# Altium PCB LedStatus.PcbDoc
Units mil, origin at the board's own origin, x right, y up, seen from the top; angles counter-clockwise.
Board outline 2650 x 2255 mil, 2 copper layers (Top Layer, Bottom Layer); 40 components, 25 nets, 158 pads, 26 vias.
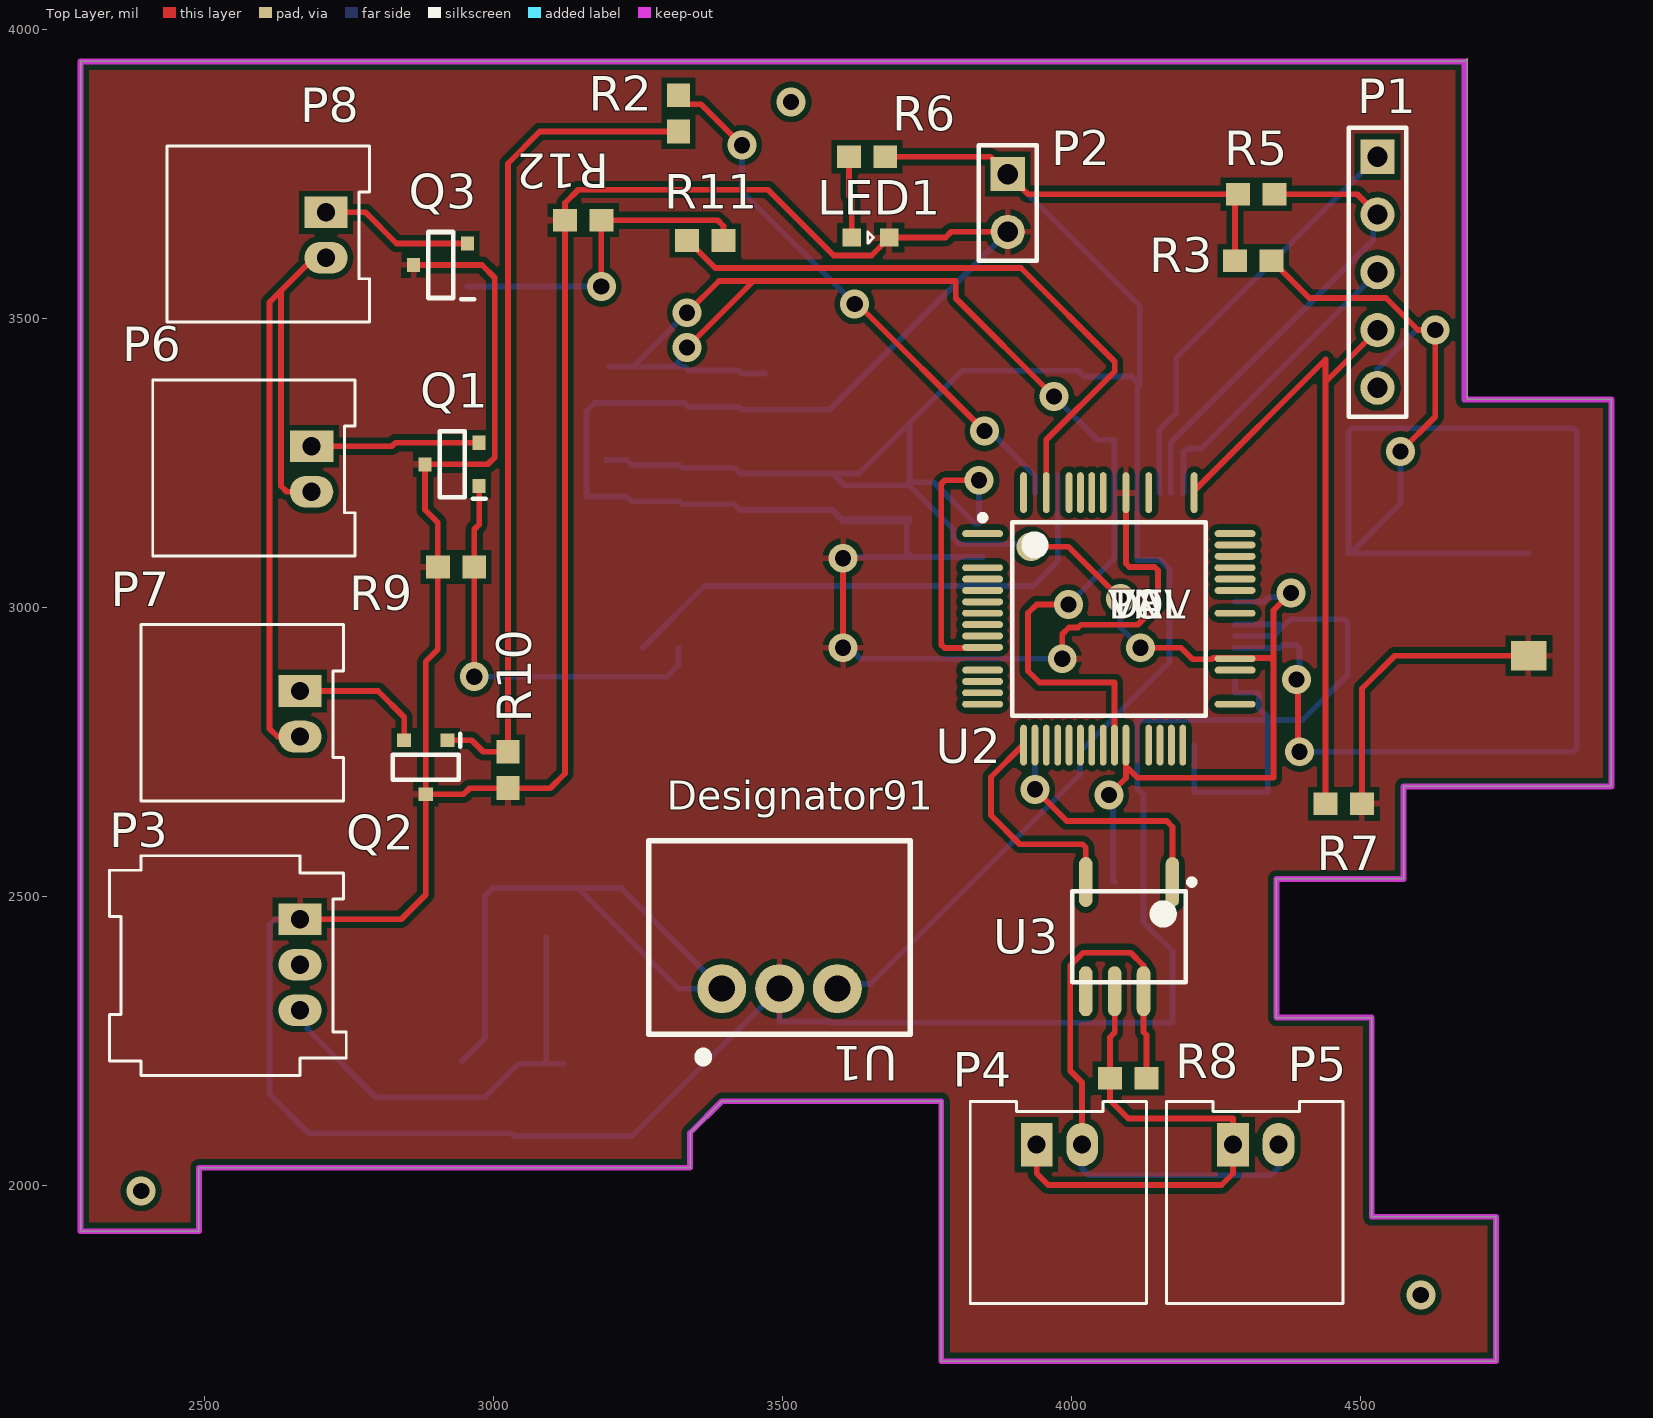
[diagram p0: Top Layer view]
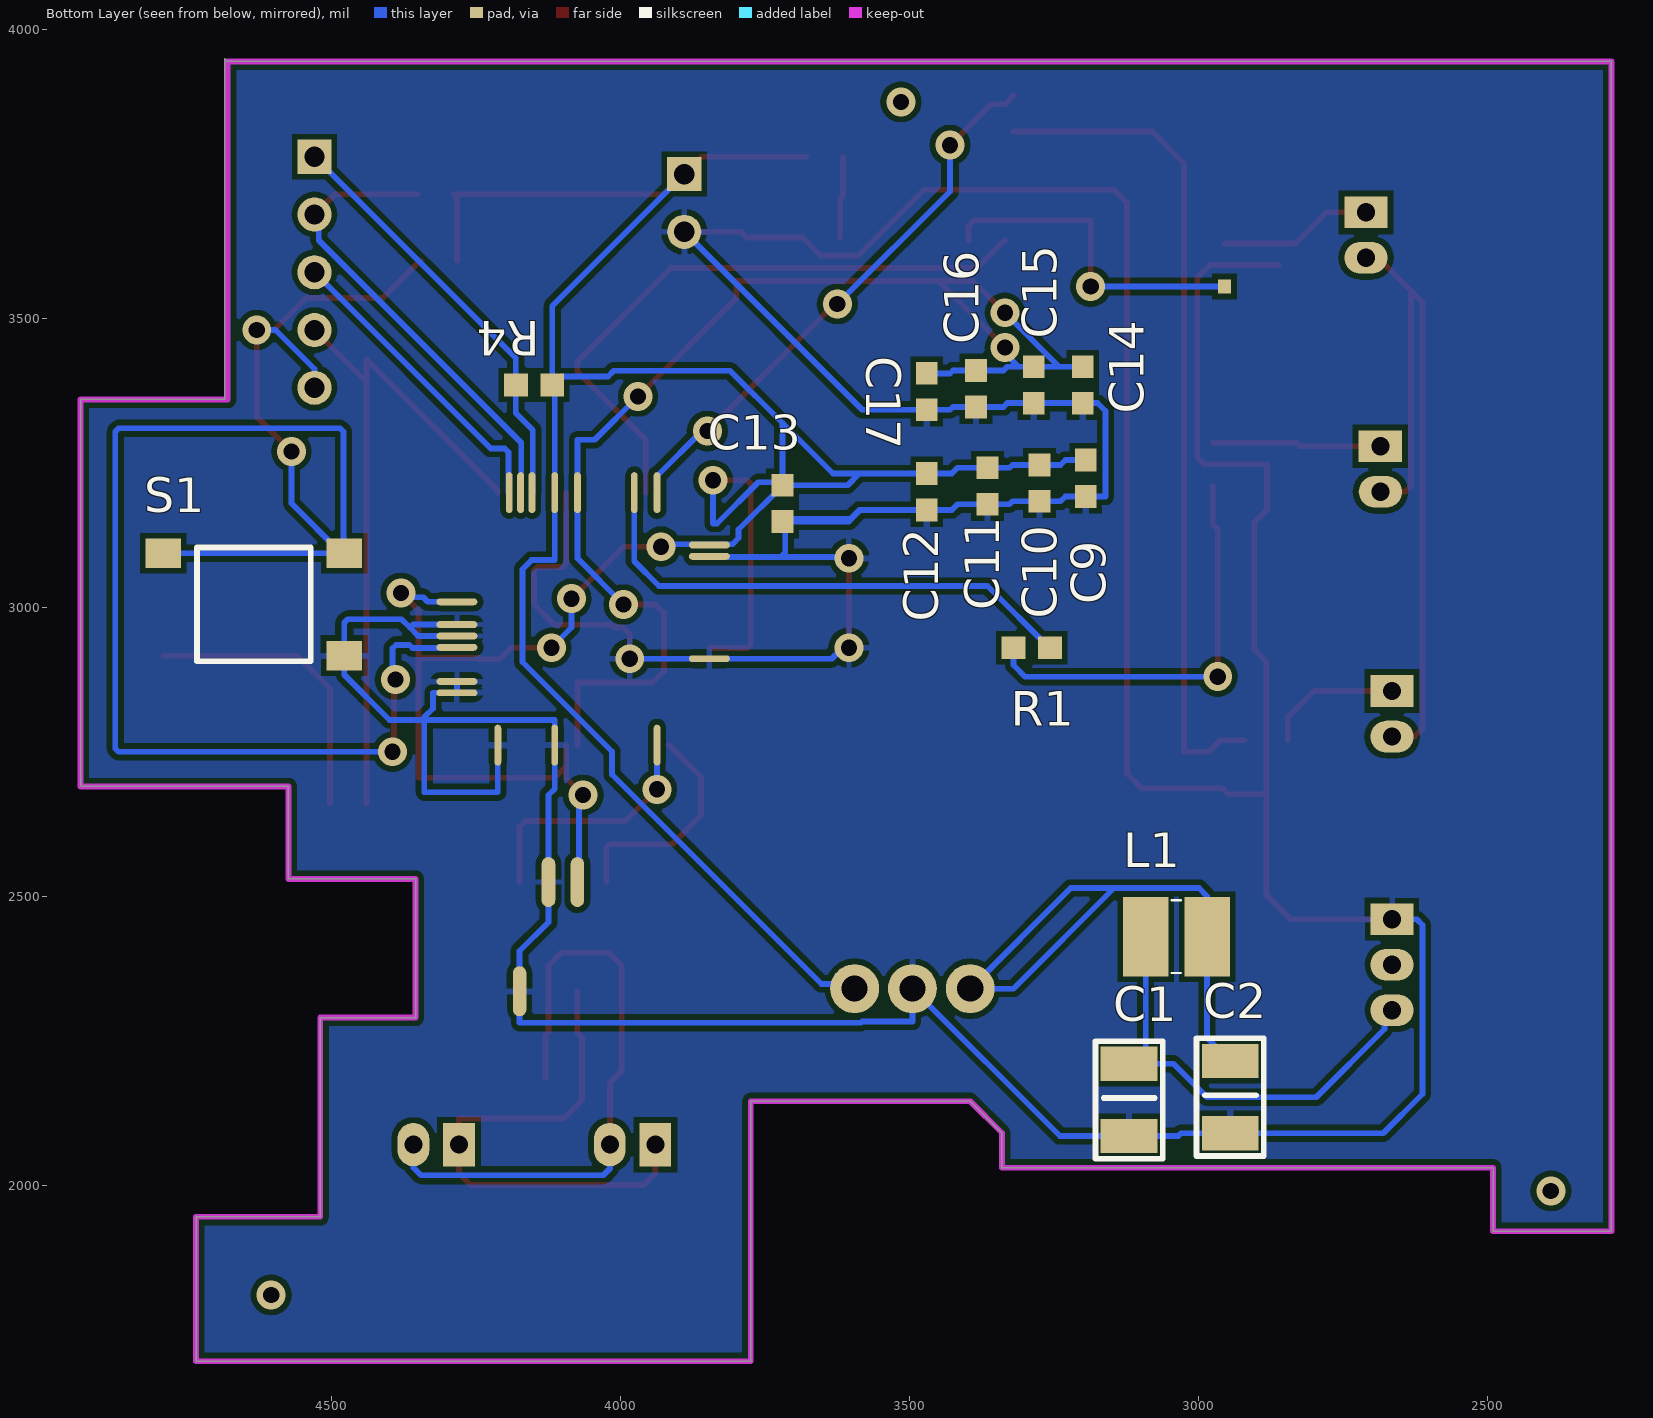
[diagram p1: Bottom Layer view, seen from below]

## Layer stack, top to bottom
Top Solder: solder mask 0.4, Solder Resist, Dk 3.5
Top Layer: signal copper 1.4
Dielectric 1: dielectric 12.6, FR-4, Dk 4.8
Bottom Layer: signal copper 1.4
Bottom Solder: solder mask 0.4, Solder Resist, Dk 3.5

## Board outline
2285,3945 2285,1920 2490,1920 2490,2030 3340,2030 3340,2090 3395,2145 3775,2145 3775,1695 4735,1695 4735,1945 4520,1945 4520,2290 4355,2290 4355,2530 4575,2530 4575,2690 4935,2690 4935,3360 4685,3360 4685,3950 4680,3945

## Design rules (kind name [scope] priority, off if disabled: settings)
Clearance [All] p1: gap=10 ignorepadtopadclearanceinfootprint=FALSE except(0: Arc-Hole Track-Hole SMDPad-Hole THPad-Hole Via-Hole Fill-Hole Poly-Hole Region-Hole Text-Hole; 5: Track-Track Track-SMDPad SMDPad-SMDPad; 7: Track-Via)
HoleSize [All] p1: absolutevalues=TRUE maxlimit=150 minlimit=10 maxpercent=80.000 minpercent=20.000
MinimumAnnularRing [All] p1: minimumring=7
MinimumSolderMaskSliver [All] p1: minsoldermaskwidth=1
PolygonConnect [All] p1: connectstyle=Relief reliefconductorwidth=10 reliefentries=4 polygonreliefangle="90 Angle" airgapwidth=10
RoutingVias [All] p1: holewidth=10 width=22 viastyle="Through Hole" minholewidth=10 minwidth=22 maxholewidth=100 maxwidth=150
SilkToSolderMaskClearance [IsPad] p1: minsilkscreentomaskgap=5 clearancetoexposedcopper=TRUE
SolderMaskExpansion [All] p1: expansion=4
Width [All] p1: maxlimit=150 minlimit=8 preferedwidth=10
27 further rules are at their usual default settings.

## Components (designator, comment, footprint, x,y, rotation, side; value= is the part's Value field where it differs from the comment)
C1 "CAP1210" CAP1210 3120,2210.79 r90 bottom value=10uF
C2 "CAP1210" CAP1210 2945,2215.79 r90 bottom value=10uF
C9 "Cap" CAPC0603 3195,3223.5 r270 bottom value=0.1uF
C10 "Cap" CAPC0603 3275,3215 r270 bottom value=0.1uF
C11 "Cap" CAPC0603 3365,3210 r270 bottom value=0.1uF
C12 "Cap" CAPC0603 3470,3200 r270 bottom value=0.1uF
C13 "Cap" CAPC0603 3720,3180 r270 bottom value=2.1uF
C14 "Cap" CAPC0603 3200,3385 r270 bottom value=0.1uF
C15 "Cap" CAPC0603 3285,3385 r270 bottom value=0.1uF
C16 "Cap" CAPC0603 3385,3378.5 r270 bottom value=1.0uF
C17 "Cap" CAPC0603 3470,3373.5 r270 bottom value=2.2uF
L1 "RLS-567" RLS567 3038.15,2430 r180 bottom
LED1 "LED" LED0603 3652.52,3640 r0 top
P1 "Header 5" HDR1X5 4530,3780 r270 top
P2 "Header 2" HDR1X2 3890,3750 r270 top
P3 "3pos RA sherlock connector" MOLEX-HDR-1X3-SHERLOCK-RA 2665,2460 r90 top
P4 "2-pin Horz Sherlock" MOLEX-HDR-1X2-SHERLOCK-HORZ 3940,2070 r180 top
P5 "2-pin Horz Sherlock" MOLEX-HDR-1X2-SHERLOCK-HORZ 4280,2070 r180 top
P6 "2-pin Horz Sherlock" MOLEX-HDR-1X2-SHERLOCK-HORZ 2685,3278.74 r90 top
P7 "2-pin Horz Sherlock" MOLEX-HDR-1X2-SHERLOCK-HORZ 2665,2855 r90 top
P8 "2-pin Horz Sherlock" MOLEX-HDR-1X2-SHERLOCK-HORZ 2710,3683.74 r90 top
Q1 "SSM3K329R,LF" SOTFL95P240X88-3N#1 2928.23,3247.6 r180 top
Q2 "SSM3K329R,LF" SOTFL95P240X88-3N#1 2882.6,2723.23 r270 top
Q3 "SSM3K329R,LF" SOTFL95P240X88-3N#2 2908.23,3592.6 r180 top
R1 "Res" RES0603 3288.5,2930 r180 bottom value=100
R2 "Res" RES0603 3320,3855 r90 top value=100
R3 "Res" RES0603 4315,3600 r0 top value=10k
R4 "Res" RES0603 4150,3385 r0 bottom value=10k
R5 "Res" RES0603 4320,3715 r0 top value=10k
R6 "Res" RES0603 3646.5,3780 r180 top value=10k
R7 "Res" RES0603 4471.5,2660 r0 top value=10k
R8 "Res" RES0603 4098.5,2185 r180 top value=120
R9 "Res" RES0603 2935,3070 r180 top value=10k
R10 "Res" RES0603 3025,2718.5 r270 top value=10k
R11 "Res" RES0603 3366.5,3635 r180 top value=100
R12 "Res" RES0603 3155,3670 r180 top value=10k
S1 "Button" PTS645xxxxSMTR92 4635,3005 r180 bottom
U1 "R-78C3.3-1.0" R-78C3.3-1.0 3395,2340 r0 top
U2 "TM4C123GH6PMT7R" PM0064A_N 4065,2980 r0 top value=Value
U3 "SN65HVD230" SOIC-8pin 4100,2430 r270 top

## Footprints (in the part's own frame and the unit in brackets; to place one, negate y for a bottom-side part, rotate by r counter-clockwise, add the part's x,y. Pads: shape width x height; smd on the part's side, far side on the other; paste and mask are expansions set on the pad)
CAP1210 [mm]
  rect 1.5x2.5 smd: 1(-0.02,0) 2(-3.2,0)
  silkscreen extent -4.2,-1.48 0.97,1.48, body extent -3.22,-1.25 0,1.26, height 2.5
CAPC0603 [mm] "Chip Capacitor, 2-Leads, Body 1.60x0.80mm, IPC Medium Density"
  rect 1x0.95 smd: 1(-0.8,0) 2(0.8,0)
  body extent -0.88,-0.48 0.87,0.48, height 0.8
HDR1X2 [mm] "Connector; Header; 2 Position"
  rect 1.5x1.5 hole 0.9: 1(0,0)
  round 1.5 hole 0.9: 2(2.54,0)
  silkscreen extent -1.27,-1.27 3.81,1.27
HDR1X5 [mm] "Connector; Header; 5 Position"
  rect 1.5x1.5 hole 0.9: 1(0,0)
  round 1.5 hole 0.9: 2(2.54,0) 3(5.08,0) 4(7.62,0) 5(10.16,0)
  silkscreen extent -1.27,-1.27 11.43,1.27
LED0603 [mm] "Chip LED, 2-Leads, Body 1.60x0.80mm, IPC Medium Density"
  rect 0.8x0.8 smd: A(-0.825,0) C(0.825,0)
  silkscreen extent -0.13,-0.25 0.13,0.25, body extent -0.88,-0.48 0.87,0.47, height 0.8
MOLEX-HDR-1X2-SHERLOCK-HORZ [mm]
  rect 1.397x1.905 hole 0.8: 1(0,0)
  oval 1.397x1.905 hole 0.8: 2(-2,0)
  silkscreen extent -4.83,-1.91 2.92,6.98, body extent -4.83,-1.91 2.87,8.59, height 5.54
MOLEX-HDR-1X3-SHERLOCK-RA [mm]
  rect 1.397x1.905 hole 0.8: 1(0,0)
  oval 1.397x1.905 hole 0.8: 2(-2,0) 3(-4,0)
  silkscreen extent -6.86,-2.03 2.79,8.38, body extent -6.88,-1.99 2.82,8.51, height 5.75
PM0064A_N [mm]
  oval 1.8x0.3 smd paste-0.102 mask+0.051: 1(-5.55,3.75) 4(-5.55,2.25) 5(-5.55,1.75) 6(-5.55,1.25) 7(-5.55,0.75) 8(-5.55,0.25) 9(-5.55,-0.25) 10(-5.55,-0.75) 11(-5.55,-1.25) 13(-5.55,-2.25) 14(-5.55,-2.75) 15(-5.55,-3.25) 16(-5.55,-3.75) 33(5.55,-3.75) 36(5.55,-2.25) 37(5.55,-1.75) 41(5.55,0.25) 43(5.55,1.25) 44(5.55,1.75) 45(5.55,2.25) 46(5.55,2.75) 47(5.55,3.25) 48(5.55,3.75)
  oval 1.8x0.3 smd far side paste-0.102 mask+0.051: 2(-5.55,3.25) 3(-5.55,2.75) 12(-5.55,-1.75) 34(5.55,-3.25) 35(5.55,-2.75) 38(5.55,-1.25) 39(5.55,-0.75) 40(5.55,-0.25) 42(5.55,0.75)
  oval 0.3x1.8 smd paste-0.102 mask+0.051: 17(-3.75,-5.55) 19(-2.75,-5.55) 20(-2.25,-5.55) 21(-1.75,-5.55) 22(-1.25,-5.55) 23(-0.75,-5.55) 24(-0.25,-5.55) 25(0.25,-5.55) 26(0.75,-5.55) 28(1.75,-5.55) 29(2.25,-5.55) 30(2.75,-5.55) 31(3.25,-5.55) 49(3.75,5.55) 53(1.75,5.55) 55(0.75,5.55) 57(-0.25,5.55) 58(-0.75,5.55) 59(-1.25,5.55) 60(-1.75,5.55) 62(-2.75,5.55) 64(-3.75,5.55)
  oval 0.3x1.8 all layers, no hole paste-0.102 mask+0.051: 18(-3.25,-5.55)
  oval 0.3x1.8 smd far side paste-0.102 mask+0.051: 27(1.25,-5.55) 32(3.75,-5.55) 50(3.25,5.55) 51(2.75,5.55) 52(2.25,5.55) 54(1.25,5.55) 56(0.25,5.55) 61(-2.25,5.55) 63(-3.25,5.55)
  silkscreen extent -5.67,-4.25 4.25,4.57, body extent -4.19,-4.19 4.19,4.19, height 0.64
PTS645xxxxSMTR92 [mm] "PTS645 Series SMT 6 mm Tactile Switch"
  rect 1.555x1.3 smd: A(-3.975,2.25) A(3.975,2.25) B(3.975,-2.25)
  rect 1.555x1.3 smd far side: B(-3.975,-2.25)
  silkscreen extent -2.5,-2.5 2.5,2.5, body extent -3,-3 3,3, height 4.5
R-78C3.3-1.0 [mm] "CONV DC/DC 1A 3.3V OUT SIP VERT"
  round 2.15 hole 1.15: 1(0,0) 2(2.54,0) 3(5.08,0)
  Bottom Layer region: 0.457,-3.048
  silkscreen extent -3.21,-3.05 8.29,6.5, body extent -3.3,-2.03 8.38,6.6, height 10.4
RES0603 [mm] "Chip Resistor, 2-Leads, Body 1.60x0.80mm, IPC Medium Density"
  rect 1.05x1 smd: 1(-0.8,0) 2(0.8,0)
  body extent -0.88,-0.48 0.87,0.47, height 0.8
RLS567 [mm]
  rect 2x3.5 smd: 1(-1.35,0) 2(1.35,0)
  silkscreen extent -0.2,-1.6 0.2,1.6, body extent -2.54,-1.91 2.54,1.91, height 2.6
SOIC-8pin [mm] "For 296-1345-1-ND"
  oval 2.2x0.6 smd: 1(-2.4,1.905) 4(-2.4,-1.905) 5(2.4,-1.905) 6(2.4,-0.635) 7(2.4,0.635)
  oval 2.2x0.6 smd far side: 2(-2.4,0.635) 3(-2.4,-0.635) 8(2.4,1.905)
  silkscreen extent -2.52,-2.5 2,2.88, body extent -2,-2.5 2,2.5, height 1.75
SOTFL95P240X88-3N#1 [mm]
  rect 0.575x0.62 smd: 1(-1.188,0.95) 2(-1.188,-0.95) 3(1.188,0)
  silkscreen extent -1.47,-1.45 0.55,1.51, body extent -1.2,-1.45 1.2,1.45, height 0.88
SOTFL95P240X88-3N#2 [mm]
  rect 0.575x0.62 smd far side: 1(-1.188,0.95)
  rect 0.575x0.62 smd: 2(-1.188,-0.95) 3(1.188,0)
  silkscreen extent -1.47,-1.45 0.55,1.51, body extent -1.2,-1.45 1.2,1.45, height 0.88

## Part data
C1 C2: "CAP CER 10UF 50V 20% X5R 1210", Supplier Part Number 1=587-2225-1-ND, Supplier 1=Digi-Key
C9 C10 C11 C12 C13 C14 C15 C16 C17: Supplier Part Number 1=1276-1000-1-ND, Supplier 1=Digi-Key
L1: "Inductor", Manufacturer_Name="RECOM Power", Mouser Part Number=919-RLS-567, Datasheet Link=https://componentsearchengine.com/Datasheets/1/RLS-567.pdf, Height=3.1mm, Manufacturer_Part_Number=RLS-567, Mouser Price/Stock=https://www.mouser.com/Search/Refine.aspx?Keyword=919-RLS-567
LED1: Color=Red, Supplier Part Number 1=754-1122-1-ND, Supplier 1=Digi-Key
P1: "Header, 5-Pin", LatestRevisionDate=17-Jul-2002, LatestRevisionNote="Re-released for DXP Platform.", Publisher="Altium Limited"
P2: "Header, 2-Pin", LatestRevisionDate=17-Jul-2002, LatestRevisionNote="Re-released for DXP Platform.", Publisher="Altium Limited"
P3: library part MOLEX-HDR-1x3-SHERLOCK_RA, "Header, Molex, 2mm Pitch Sherlock Header, Single Row, Right Angle 3 Circuits, Length 3.3mm", Manufacturer="Molex Connector Corporation", Manufacturer Part Number=35363-0360, Supplier Part Number 1=WM18932-ND, Supplier 1=Digi-Key
P4 P5 P6 P7 P8: library part MOLEX-HDR-1x2-SHERLOCK_RA, "Header, Molex, 2mm Pitch Sherlock Header, Single Row, Horizontal, 2 Circuits, Length 3.3mm,  0353630260", Manufacturer="Molex Inc", Manufacturer Part Number=0353630260, Supplier Part Number 1=WM18931-ND, Supplier 1=Digi-Key
Q1 Q2 Q3: "Transistor", Manufacturer_Name=Toshiba, Datasheet Link=https://toshiba.semicon-storage.com/info/docget.jsp?did=2157&prodName=SSM3K329R, Height=0.88mm, Manufacturer_Part_Number=SSM3K329R,LF
R1 R2 R3 R4 R5 R6 R7 R8 R9 R10 R11 R12: Supplier Part Number 1=RMCF0603JT10K0CT-ND, Supplier 1=Digi-Key
S1: "SPST Button", Supplier Part Number 1=CKN9087CT-ND, Supplier 1=Digi-Key
U1: "CONV DC/DC 1A 3.3V OUT SIP VERT", Supplier Part Number 1=945-1394-5-ND, Supplier 1=Digi-Key
U2: "Imported", Alternate_PartNumber=TM4C123GH6PMT, Manufacturer="Texas Instruments", PartNumber=TM4C123GH6PMTR, CompType=IC, MountType=SMT, PackageReference=PM0064A, PIN_COUNT=64, RefDes=RefDes, RoHS=Y, TYPE=TYPE
U3: "3.3V CAN Bus Transceiver"

## Via types
v1: diameter 50, hole 28, Top Layer to Bottom Layer, 26 vias

## Nets (pads, with @x,y where several pads share a name; then routed paths per layer and width w, separated by ;. In a path a pad name is that pad's centre, name@x,y a point inside that pad or via, vN(x,y) a via of type N, cw(c..) or ccw(c..) an arc to the next point about the centre after c; other vN are vias at no path point)
24V: P6.2 P7.2 P8.2 | length 1321.7
  Top Layer w10: P7.2 2625.74,2776.26 2612,2790 2612,3528 2632,3548 ; P6.2 2642,3200 2632,3210 2632,3548 ; P8.2 2689,3605 2632,3548
CAN1_RX: U2.17 U3.4 | length 392.5
  Top Layer w10: U2.17 3916.14,2761.5 3860.86,2706.21 3860.86,2640 3910.86,2590 4019.14,2590 4025,2584.14 U3.4
CAN1_TX: U2.18 U3.1 | length 436.9
  Top Layer w10: v1(3937.05,2685) 3992.05,2630 4165,2630 4175,2620 U3.1
  Bottom Layer w10: v1(3937.05,2685) U2.18
GND: C1.2 C2.2 C9.2 C10.2 C11.2 C12.2 C13.2 C14.2 C15.2 C16.2 C17.2 LED1.C P2.2 P3.1 Q1.3 Q2.3 Q3.3 R7.2 R9.2 R10.2 R12.2 S1.B U1.2 U2.3 U2.12 U2.27 U2.32 U2.34 U2.35 U2.39 U2.40 U2.55 U3.2 U3.8 | length 11114.7
  Top Layer w10: P3.1 2840,2460 2882.6,2502.6 Q2.3 ; Q3.3 2980,3592.6 3002,3570.6 3002,3259.6 2990,3247.6 Q1.3 2881.46,3169.05 2903.5,3147 R9.2 2903.5,2927 2882.6,2906.09 Q2.3 ; v1(3605,2930) v1(3605,3085) ; P2.2 3792,3650 3782,3640 LED1.C 3654.25,3609.25 3588.75,3609.25 3475,3723 3146.5,3723 3123.5,3700 R12.2 3123.5,2712.51 3098,2687.01 R10.2 2958.55,2687.01 2948,2676.46 Q2.3 ; v1(3984.33,2911.1) 3984.33,2953.47 3995.86,2965 4011.57,2965 4016.57,2970 4115,2970 4150,3005 4150,3064.14 4144.14,3070 4100.39,3070 4094.53,3075.86 U2.55 ; R7.2 4502.99,2859.41 4560,2916.42 S1.B@4791.5,2916.42
  Bottom Layer w10: P3.1 2622,2460 2612,2450 2612,2157.8 2680,2089.8 C2.2 3030,2089.8 3035,2084.8 C1.2 3239.8,2084.8 U1.2 3495,2283 3582,2283 3584,2281 4175,2281 U3.8 4175,2405 4125,2455 U3.2 4125,2675 4114.21,2685.79 U2.27 4114.21,2805 4340,2805 ; v1(3605,2930) 3615.82,2930 3634.72,2911.1 U2.12 v1(3984.33,2911.1) ; v1(3605,3085) 3607.05,3087.05 3722.95,3087.05 ; C13.2@3720,3153.5 3602,3153.5 3587,3168.5 3585,3168.5 ; U2.3 3846.5,3087.05 3722.95,3087.05 ; P2.2 3582.01,3342.01 C17.2 3430,3342.01 3425,3347.01 C16.2 3337.5,3347.01 3331,3353.5 C15.2 C14.2 3174.5,3353.5 3161,3340 3161,3192.01 C9.2 3230,3192.01 3238.5,3183.5 C10.2 3322,3183.5 3327,3178.5 C11.2 3417,3178.5 3427,3168.5 C12.2 3585,3168.5 ; U2.32 4212.64,2680 4340,2680 4340,2805 ; U2.35 U2.34 4325,2852.05 4325,2825 4340,2810 ; U2.39 4350.47,2950.47 4364.92,2964.92 ; U2.40 4359.68,2970.16 4364.92,2964.92 ; 3585,3168.5 3605,3148.5 C13.2 3715,3143.5 3715,3095 3722.95,3087.05 ; 4340,2805 4400,2805 4478.5,2883.5 4478.5,2916.42 4478.5,2973.5 4472.65,2979.36 4379.36,2979.36 4364.92,2964.92
LED0: R1.2 U2.61 | length 929.6
  Bottom Layer w10: R1.2 3257.99,2930 3365.12,3037.13 3933.54,3037.13 3976.42,3080 U2.61 U2.61@3976.42,3228.03
LED1: R11.2 U2.62 | length 1102.5
  Top Layer w10: R11.2 3335.98,3635 3383.78,3587.2 3912.8,3587.2 4075,3425 4075,3408.27 3956.73,3290 U2.62
LED2: R2.2 U2.63 | length 969
  Top Layer w10: R2.2 3320,3885.51 3334.69,3870.83 3359.17,3870.83 v1(3430,3800) ; v1(3625,3525) 3630,3525 v1(3850,3305) v1@3847.5,3305
  Bottom Layer w10: v1(3430,3800) 3430,3720 v1(3625,3525) ; v1(3850,3305) 3859.59,3305 3937.05,3227.54 U2.63
NetC2_1: C2.1 L1.2 U1.1 | length 1110.5
  Bottom Layer w10: C2.1 2985,2255 L1.2 2985,2500 2999,2514 3146,2514 ; 3146,2514 3320,2340 U1.1 3221,2514 3146,2514
NetLED1_A: LED1.A R6.2 | length 142.1
  Top Layer w10: R6.2 3615,3712.04 3620.04,3707 LED1.A
NetP4_1: P4.1 P5.1 R8.2 U3.6 | length 919.6
  Top Layer w10: P4.1 3940,2020 3960,2000 4260,2000 4280,2020 P5.1 4280,2115 4099.01,2115 4067.01,2147 R8.2 4067.01,2256 4075,2263.99 U3.6
NetP4_2: P4.2 P5.2 R8.1 U3.7 | length 1092.7
  Top Layer w10: P4.2 4018.74,2177.26 3998,2198 3998,2380 4020,2402 4103,2402 4125,2380 U3.7 4125,2265 4130,2260 R8.1
  Bottom Layer w10: P4.2 4018.74,2028.26 4030,2017 4345.74,2017 4358.74,2030 P5.2
NetP6_1: P6.1 Q1.2 | length 292.6
  Top Layer w10: P6.1 2823.74,3278.74 2830,3285 Q1.2
NetP7_1: P7.1 Q2.2 | length 238.7
  Top Layer w10: P7.1 2800,2855 2845.2,2809.8 Q2.2
NetP8_1: P8.1 Q3.2 | length 267.3
  Top Layer w10: P8.1 2778.26,3683.74 2832,3630 Q3.2
NetQ1_1: Q1.1 R1.1 R9.1 | length 725.5
  Top Layer w10: v1(2966.5,2880) R9.1 2966.5,3135 2975,3143.5 Q1.1
  Bottom Layer w10: v1(2966.5,2880) 3300,2880 3320,2900 R1.1
NetQ2_1: Q2.1 R2.1 R10.1 | length 1449.6
  Top Layer w10: Q2.1 2962,2770 2982,2750 R10.1 3025,3768.5 3080,3823.5 R2.1
NetQ3_1: Q3.1 R11.1 R12.1 | length 586.9
  Top Layer w10: v1(3186.5,3555.2) R12.1 3387.99,3670 3397.99,3660 R11.1
  Bottom Layer w10: Q3.1 v1(3186.5,3555.2)
RST_N: P1.5 R3.2 S1.A U2.38 | length 3196.2
  Top Layer w10: R3.2 4347.48,3600 4412.01,3535.47 4544.53,3535.47 4600,3480 v1(4630,3480) ; v1(4390,2875) 4392.5,2872.5 4392.5,2752.5 v1(4395,2750) ; v1(4570,3270) 4630,3330 v1(4630,3480) ; v1@4630,3481.25 v1(4630,3480)
  Bottom Layer w10: U2.38@4283.5,2929.57 4360.51,2929.57 4365.94,2935 4389.14,2935 4395,2929.14 4395,2880 v1(4390,2875) ; v1(4395,2750) 4869.14,2750 4875,2755.86 4875,3304.14 4869.14,3310 4485.86,3310 4480,3304.14 4480,3095.08 4478.5,3093.58 S1.A@4483.52,3093.58 ; P1.5 4530,3412.5 4597.5,3480 v1(4630,3480) ; v1(4570,3270) 4570,3180.06 S1.A@4483.52,3093.58 ; S1.A@4791.5,3093.58 S1.A@4483.52,3093.58
TCK/SWCLK: P1.1 R4.2 U2.52 | length 848.1
  Bottom Layer w10: U2.52 U2.52@4152.05,3198.5 ; P1.1 4181.5,3431.5 R4.2 4181.5,3336.5 4152.05,3307.05 ; U2.52@4152.05,3198.5 4152.05,3307.05 ; U2.52@4152.05,3198.5 4152.05,3307.05
TDI: P1.3 U2.50 | length 536
  Bottom Layer w10: U2.50 4194.17,3198.5 4194.17,3268.32 4200.86,3275 4225,3275 P1.3
TDO/SWO: P1.4 R7.1 U2.49 | length 1221.5
  Top Layer w10: U2.49 4212.64,3201.73 4440,3429.09 ; R7.1 4440,3390 ; 4440,3429.43 4440,3429.09 ; P1.4 4440,3390 ; 4440,3390 4440,3429.09
TMS/SWDIO: P1.2 R5.2 U2.51 | length 824
  Top Layer w10: R5.2 4495,3715 P1.2
  Bottom Layer w10: U2.51 4172.05,3198.5 4172.05,3285.02 4522.5,3635.47 4522.5,3672.5 P1.2
VDD: C9.1 C10.1 C11.1 C12.1 C13.1 P2.1 R3.1 R4.1 R5.1 R6.1 U1.3 U2.2 U2.11 U2.26 U2.37 U2.42 U2.54 U3.3 | length 6229.4
  Top Layer w10: R6.1 3860,3780 P2.1 3925,3715 R5.1 4283.5,3710 R3.1 ; v1(3840,3220) 3780.86,3220 3775,3214.14 3775,2935.42 3780.86,2929.57 U2.11@3846.5,2929.57 ; v1(3930,3105) 3995,3105 v1(4085,3015) ; v1(4065,2675) 4094.53,2704.53 4094.53,2724.93 ; U2.26 4094.53,2724.93 ; v1(4120,2930) 4190,2930 4210,2910 4242.99,2910 4245.32,2912.32 4283.5,2912.32 4344.14,2912.32 4350,2906.47 ; v1(4380,3025) 4350,2995 4350,2906.47 ; 4094.53,2724.93 4114.46,2705 4350,2705 4350,2906.47
  Bottom Layer w10: C9.1 3230,3255 3238.5,3246.5 C10.1 3322,3246.5 3327,3241.5 C11.1 3417,3241.5 3427,3231.5 C12.1 3587,3231.5 ; U1.3 3602.95,2347.95 3652.32,2347.95 4015,2710.63 4015,2750.61 4170,2905.61 4170,3066.14 4154.14,3082 4114.21,3082 U2.54 4114.21,3380.71 R4.1 ; v1(3840,3220) 3840,3145 3833.5,3145 3762,3216.5 3720,3216.5 3720,3319 ; P2.1 4118.5,3521.5 R4.1 ; v1(3930,3105) 3925.83,3109.17 3846.5,3109.17 3806.68,3109.17 3795.86,3120 3795.86,3134.65 3720,3210.51 C13.1 3607,3211.5 3587,3231.5 ; v1(4065,2675) 4072.39,2667.61 4072.39,2527.09 U3.3 ; v1(4085,3015) 4085,2965 v1(4120,2930) ; U2.42 4333.94,3009.53 4341.76,3017.35 4372.35,3017.35 v1(4380,3025) ; 3587,3231.5 3632.5,3231.5 3720,3319 ; 3720,3319 3810.69,3409.69 4011.88,3409.69 4021.88,3399.69 4103.82,3399.69 R4.1
VDDC: C14.1 C15.1 C16.1 C17.1 U2.25 U2.56 | length 2267.9
  Top Layer w10: v1(3335,3450) 3450,3565 ; v1(3335,3510) 3390,3565 3450,3565 ; v1(3970,3365) 3800,3535 3800,3565 3450,3565 ; v1(3995,3005) 3940,3005 3925,2990 3925,2890 3945,2870 4055,2870 4055.16,2869.84 4074.84,2869.84 U2.25
  Bottom Layer w10: C14.1 3241.5,3416.5 ; v1(3335,3450) 3335,3440 3311.5,3416.5 ; v1(3335,3510) 3241.5,3416.5 ; C17.1 3430,3405 3425,3410 C16.1 3337.5,3410 3331,3416.5 3311.5,3416.5 ; v1(3970,3365) 4044.84,3290.16 4074.84,3290.16 U2.56 4074.84,3084.84 v1(3995,3005) ; 3241.5,3416.5 C15.1 3311.5,3416.5
VIN: C1.1 L1.1 P3.3 | length 1032.9
  Bottom Layer w10: P3.3 P3.3@2678,2302.52 ; C1.1 C1.1@3091.3,2210 ; 2678,2270 2796,2152 2985,2152 3043,2210 C1.1@3091.3,2210 ; 2678,2270 P3.3@2678,2302.52 ; 2678,2270 P3.3@2678,2302.52 ; C1.1@3091.3,2210 L1.1 C1.1@3091.3,2210
pads on no net: P3.2 U2.1 U2.4 U2.5 U2.6 U2.7 U2.8 U2.9 U2.10 U2.13 U2.14 U2.15 U2.16 U2.19 U2.20 U2.21 U2.22 U2.23 U2.24 U2.28 U2.29 U2.30 U2.31 U2.33 U2.36 U2.41 U2.43 U2.44 U2.45 U2.46 U2.47 U2.48 U2.53 U2.57 U2.58 U2.59 U2.60 U2.64 U3.5
copper on no net:
  other v1: 4605,1810 2390,1990 3515,3875

## Polygon pours and split planes (outlines as drawn)
GND on Top Layer (solid, pour order 22): 2285,3945 4680,3945 4675,3940 4675,3365 4680,3360 4925,3360 4930,3365 4935,3360 4935,2690 4575,2690 4575,2530 4355,2530 4355,2290 4520,2290 4520,1945 4735,1945 4735,1695 3775,1695 3775,2145 3395,2145 3340,2090 3340,2030 2490,2030 2490,1920 2285,1920
GND on Top Layer "Top Layer-GND 2" (solid, pour order 18): 5270,2510
GND on Top Layer "Top Layer-GND" (solid, pour order 10): 0,0
no net on Top Layer "Top Layer-No Net 2" (solid, pour order 4): 2940,1850
no net on Top Layer "Top Layer-No Net 3" (solid, pour order 2): 4580,2385
GND on Bottom Layer (solid, pour order 20): 2285,3945 4680,3945 4680,3360 4935,3360 4935,2690 4575,2690 4575,2530 4355,2530 4355,2290 4520,2290 4520,1945 4735,1945 4735,1695 3775,1695 3775,2145 3395,2145 3340,2090 3340,2030 2490,2030 2490,1920 2285,1920

## Keep-outs
Keep-Out Layer:
  lines w10: 2285,1920 2490,1920 2490,2030 3340,2030 3340,2090 3395,2145 3775,2145 3775,1695 4735,1695 4735,1945 4520,1945 4520,2290 4355,2290 4355,2530 4575,2530 4575,2690 4935,2690 4935,3360 4680,3360 4680,3945 2285,3945 2285,1920

## Text inside footprints (layer, text, board x,y; h text height)
U2: Top Overlay "Designator91" at 3300,2650 h50; Top Overlay "TOL" at 4065,2980 h50; Top Overlay "VAL" at 4065,2980 h50; Top Overlay "PN" at 4065,2980 h50; Top Overlay "DEV" at 4065,2980 h50